# EAGLE board WAVESHIELD (EAGLE 6.1)
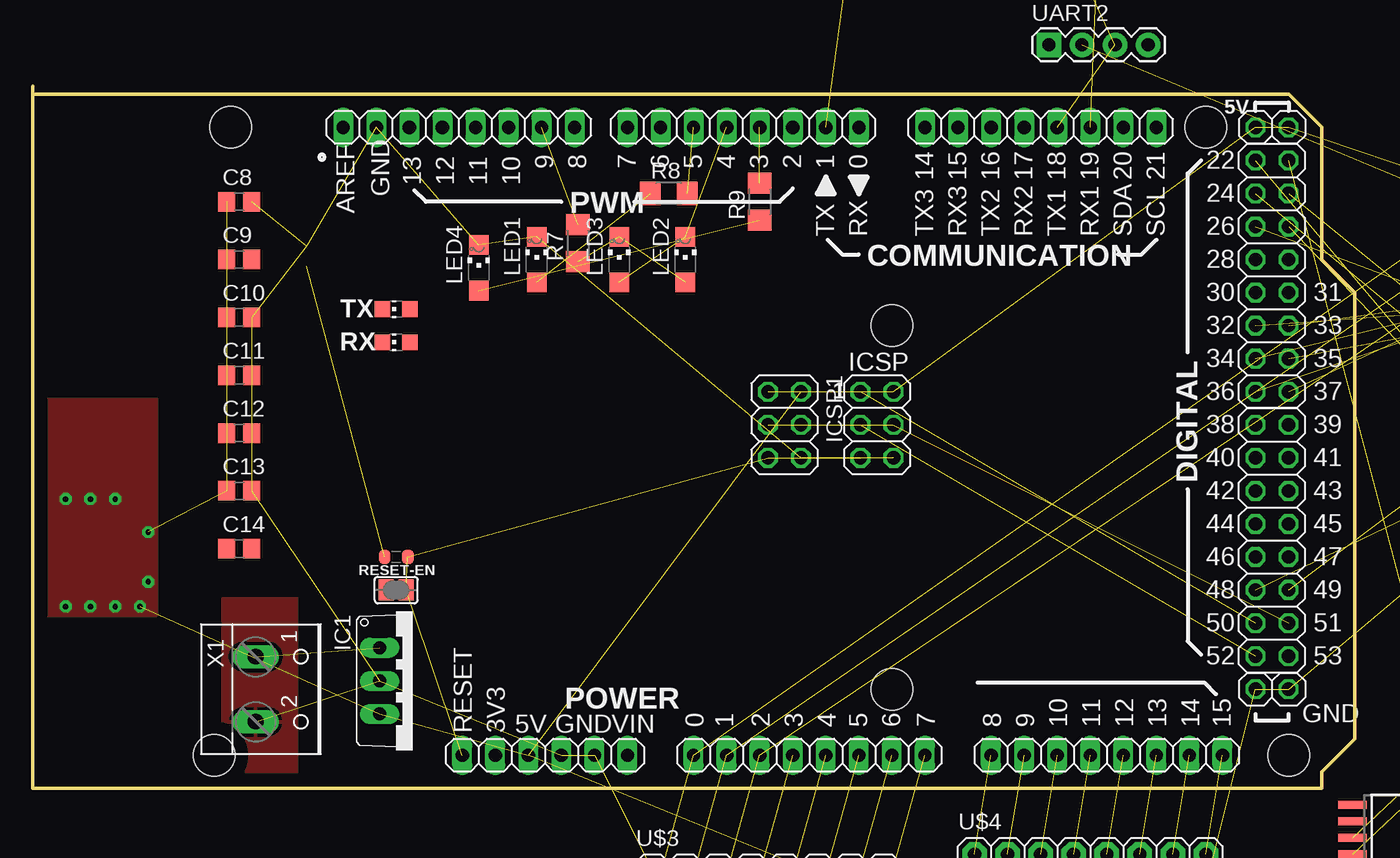
[diagram p0: board, top side]
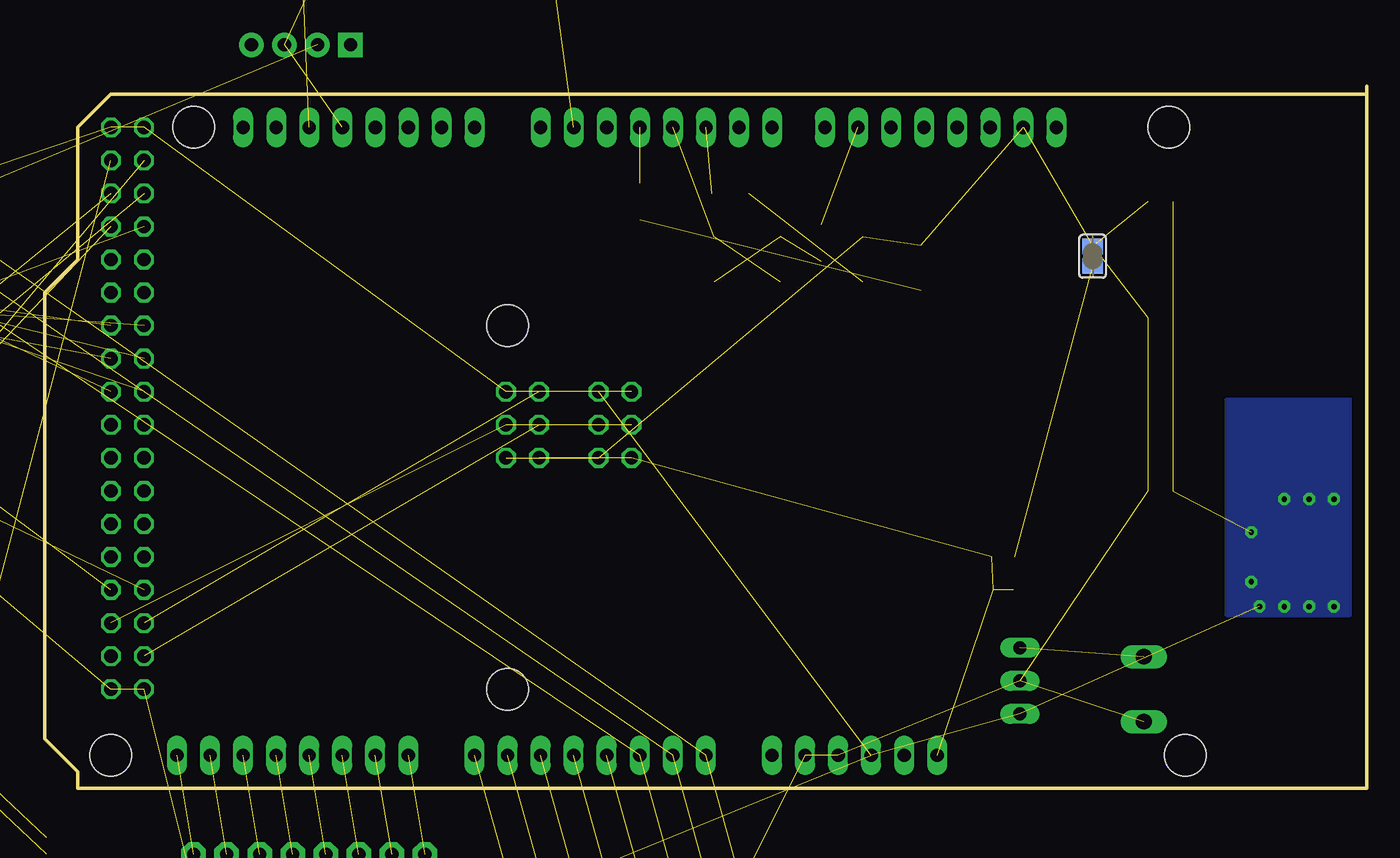
[diagram p1: board, bottom side, seen from below]

Size 101.6 x 53.98 mm. Coordinates in mm from the lower left corner, seen from the top.
Outline: 0,53.34 96.52,53.34 99.06,50.8 99.06,40.64 101.6,38.1 101.6,3.81 99.06,1.27 99.06,0 0,0 0,53.34
Outline: 0,53.34 0,53.98
Copper layers (1*16): Top 0.035mm / dielectric 1.5mm / Bottom 0.035mm
Design rules: minimum track width 6mil, minimum drill 12mil, track to track 6mil, track to pad 6mil, pad to pad 6mil, via to via 6mil, smd to smd 6mil, copper to edge 40mil, drill to drill 12mil, minimum pad ring 10mil, minimum via ring 10mil, stop-mask expansion 2mil, vias tented up to drill 1mil, thermal gap 10mil
Net classes: 0 default: width 0.152 mm, drill 0.305 mm, clearance 0.152 mm
Holes 3.2 mm at 96.52,2.54 15.24,50.8 90.17,50.8 13.97,2.54 66.04,35.56 66.04,7.62

## Footprints (pad centres in the part's own frame; a part is rotated, then mirrored left to right if it is on the bottom)
C0805 = smd 1.3 x 1.5: 1 -0.95,0; 2 0.95,0
C0603-ROUND = smd 0.898 x 1.1: 1 -0.889,0; 2 0.889,0
1X08 = drill 1.016 long: 1 -8.89,0; 2 -6.35,0; 3 -3.81,0; 4 -1.27,0; 5 1.27,0; 6 3.81,0; 7 6.35,0; 8 8.89,0
TO220V = drill 1.016 long: 1 -2.54,-2.54; 2 0,-2.54; 3 2.54,-2.54
SO-16W = smd 0.6 x 2.2: 1 -4.445,-4.6; 2 -3.175,-4.6; 3 -1.905,-4.6; 4 -0.635,-4.6; 5 0.635,-4.6; 6 1.905,-4.6; 7 3.175,-4.6; 8 4.445,-4.6; 9 4.445,4.6; 10 3.175,4.6; 11 1.905,4.6; 12 0.635,4.6; 13 -0.635,4.6; 14 -1.905,4.6; 15 -3.175,4.6; 16 -4.445,4.6
2X03 = drill 1.016 octagon: 1 -2.54,-1.27; 2 -2.54,1.27; 3 0,-1.27; 4 0,1.27; 5 2.54,-1.27; 6 2.54,1.27
1X01 = drill 1.016 octagon: 1 0,0
2X5-SHROUDED_LOCK = drill 1.016 pad 1.88 octagon: 1 -1.397,5.08; 2 1.397,5.08; 3 -1.397,2.54; 4 1.397,2.54; 5 -1.397,0; 6 1.397,0; 7 -1.397,-2.54; 8 1.397,-2.54; 9 -1.397,-5.08; 10 1.397,-5.08
CHIPLED_1206 = smd 1.5 x 1.5: A 0,-1.75; C 0,1.75
1X06 = drill 1.016 long: 1 -6.35,0; 2 -3.81,0; 3 -1.27,0; 4 1.27,0; 5 3.81,0; 6 6.35,0
M0805 = smd 1.3 x 1.6: 1 -0.95,0; 2 0.95,0
R1206 = smd 1.6 x 1.803: 1 -1.422,0; 2 1.422,0
SJ = smd 1.168 x 1.6: 1 -0.762,0; 2 0.762,0
CHIP-LED0805 = smd 1.2 x 1.2: A 0,-1.05; C 0,1.05
2X4 = drill 1.016 pad 1.88 octagon: 1 -3.81,-1.27; 2 -3.81,1.27; 3 -1.27,-1.27; 4 -1.27,1.27; 5 1.27,-1.27; 6 1.27,1.27; 7 3.81,-1.27; 8 3.81,1.27
2X8 = drill 1.016 pad 1.88 octagon: 1 0,0; 2 0,2.54; 3 2.54,0; 4 2.54,2.54; 5 5.08,0; 6 5.08,2.54; 7 7.62,0; 8 7.62,2.54; 9 10.16,0; 10 10.16,2.54; 11 12.7,0; 12 12.7,2.54; 13 15.24,0; 14 15.24,2.54; 15 17.78,0; 16 17.78,2.54
1X04 = drill 1.016 pad 1.88 square: 1 0,0 | drill 1.016 pad 1.88: 2 2.54,0; 3 5.08,0; 4 7.62,0
W237-102 = drill 1.194 long: 1 -2.5,-1.27; 2 2.5,-1.27
2X08 = drill 1.016 octagon: 1 -8.89,-1.27; 2 -8.89,1.27; 3 -6.35,-1.27; 4 -6.35,1.27; 5 -3.81,-1.27; 6 -3.81,1.27; 7 -1.27,-1.27; 8 -1.27,1.27; 9 1.27,-1.27; 10 1.27,1.27; 11 3.81,-1.27; 12 3.81,1.27; 13 6.35,-1.27; 14 6.35,1.27; 15 8.89,-1.27; 16 8.89,1.27

## Placement (x,y rotation side)
C1  [C0805]  111.12,-12.7 0 top  (outside the outline)
C2  [C0805]  106.68,-13.33 0 top  (outside the outline)
C3  [C0805]  124.46,-8.25 0 top  (outside the outline)
C4  [C0805]  129.54,-7.62 0 top  (outside the outline)
C5  [C0805]  136.53,-10.16 0 top  (outside the outline)
C6  [C0805]  140.34,-8.25 0 top  (outside the outline)
C7  100n  [C0603-ROUND]  27.94,17.78 0 top
C8  [C0805]  15.88,45.09 0 top
C9  [C0805]  15.88,40.64 0 top
C10  [C0805]  15.88,36.2 0 top
C11  [C0805]  15.88,31.75 0 top
C12  [C0805]  15.88,27.31 0 top
C13  [C0805]  15.88,22.86 0 top
C14  [C0805]  15.88,18.42 0 top
COMMUNICATION  [1X08]  77.47,50.8 180 top
IC1  7805TV  [TO220V]  29.21,8.25 270 top
IC2  AD7376  [SO-16W]  106.05,-5.71 90 top
IC3  AD7376  [SO-16W]  127,13.97 90 top  (outside the outline)
IC4  AD7376  [SO-16W]  137.16,24.77 90 top  (outside the outline)
ICSP  ICSP  [2X03]  64.9,27.94 270 top
ICSP1  ICSP  [2X03]  57.78,27.94 270 top
JP1  [1X01]  93.98,50.8 0 top
JP2  [1X01]  96.52,50.8 0 top
JP3  [1X01]  93.98,7.62 0 top
JP4  [1X01]  96.52,7.62 0 top
JP6  [2X03]  12.7,-10.79 0 top  (outside the outline)
JP7  [1X08]  81.28,-11.43 0 top  (outside the outline)
KNUCK1  M05X2SHD_LOCK  [2X5-SHROUDED_LOCK]  125.09,40.64 0 top  (outside the outline)
KNUCK2  M05X2SHD_LOCK  [2X5-SHROUDED_LOCK]  139.06,41.28 0 top  (outside the outline)
KNUCK3  M05X2SHD_LOCK  [2X5-SHROUDED_LOCK]  111.12,41.28 0 top  (outside the outline)
LED1  [CHIPLED_1206]  38.73,40.64 0 top
LED2  [CHIPLED_1206]  50.16,40.64 0 top
LED3  [CHIPLED_1206]  45.09,40.64 0 top
LED4  [CHIPLED_1206]  34.29,40.01 0 top
PE1  [2X03]  61.59,67.31 90 top  (outside the outline)
PE2  [2X03]  80.64,67.95 270 top  (outside the outline)
PE7  [2X03]  111.12,23.5 90 top  (outside the outline)
PORTF  [1X08]  59.69,2.54 0 top
PORTL  [1X08]  82.55,2.54 0 top
POWER  [1X06]  39.37,2.54 0 top
PWMH  [1X08]  32.77,50.8 180 top
PWML  [1X08]  54.61,50.8 180 top
R1  [M0805]  110.49,-15.87 0 top  (outside the outline)
R2  [M0805]  106.05,-15.87 0 top  (outside the outline)
R3  [M0805]  123.82,-12.7 0 top  (outside the outline)
R4  [M0805]  128.27,-10.79 0 top  (outside the outline)
R5  [M0805]  140.97,-13.97 0 top  (outside the outline)
R6  [M0805]  137.16,-13.97 0 top  (outside the outline)
R7  [R1206]  41.91,41.91 90 top
R8  [R1206]  48.89,45.72 0 top
R9  [R1206]  55.88,45.09 90 top
RESET-EN  [SJ]  27.94,15.24 0 top
RX  YELLOW  [CHIP-LED0805]  27.94,34.29 90 top
TX  YELLOW  [CHIP-LED0805]  27.94,36.83 90 top
U$1  M04X2  [2X4]  106.05,-20.32 0 top  (outside the outline)
U$2  M04X2  [2X4]  125.09,-18.41 0 top  (outside the outline)
U$3  M08X2  [2X8]  47.62,-8.89 0 top  (outside the outline)
U$4  M08X2  [2X8]  72.39,-7.62 0 top  (outside the outline)
U$5  M04X2  [2X4]  137.79,-18.41 0 top  (outside the outline)
UART2  [1X04]  78.11,57.15 0 top  (outside the outline)
UBOOT  [SJ]  21.08,40.89 90 bottom
X1  [W237-102]  18.41,7.62 270 top
XIOH  [2X08]  95.25,39.37 90 top
XIOL  [2X08]  95.25,19.05 90 top

## Library data of the parts
C1-C6 C8-C14 = rcl
C7 = SmartPrj
COMMUNICATION ICSP ICSP1 JP1-JP4 JP6 JP7 PE1 PE2 PE7 PORTF PORTL POWER PWMH PWML XIOH XIOL = pinhead
IC1 = linear
IC2-IC4 = analog-devices
KNUCK1-KNUCK3 U$1-U$5 UART2 = SparkFun-Connectors
LED1-LED4 RX TX = led
R1-R9 = resistor
RESET-EN UBOOT = jumper
X1 = con-wago-500; MPN: 237-102; OC_FARNELL: unknown; OC_NEWARK: 70K9898

## Nets
+5V: C8.1 C9.1 C10.1 C12.1 C13.1 IC1.3 ICSP1.2 ICSP.2 JP1.1 JP2.1 JP7.1 JP7.2 JP7.3 JP7.4 JP7.5 JP7.6 JP7.7 JP7.8 KNUCK1.1 KNUCK1.2 KNUCK2.1 KNUCK2.2 KNUCK3.1 KNUCK3.2 POWER.3
ADC8: PORTL.1 U$4.2
ADC9: PORTL.2 U$4.4
ADC10: PORTL.3 U$4.6
ADC11: PORTL.4 U$4.8
ADC12: PORTL.5 U$4.10
ADC13: PORTL.6 U$4.12
ADC14: PORTL.7 U$4.14
ADC15: PORTL.8 U$4.16
AREF: PWMH.8
DTR: C7.1 UBOOT.1
GND: C1.2 C2.2 C3.2 C4.2 C5.2 C6.2 C8.2 C10.2 C12.2 C13.2 IC1.2 IC2.4 IC3.4 IC4.4 ICSP1.6 ICSP.6 JP3.1 JP4.1 KNUCK1.4 KNUCK1.6 KNUCK1.8 KNUCK1.10 KNUCK2.4 KNUCK2.6 KNUCK2.8 KNUCK2.10 KNUCK3.4 KNUCK3.6 KNUCK3.8 KNUCK3.10 LED1.C LED4.C PE7.1 PE7.3 PE7.5 POWER.4 POWER.5 PWMH.7 U$3.2 U$3.4 U$3.6 U$3.8 U$3.10 U$3.12 U$3.14 U$3.16 U$4.15 UART2.2 UBOOT.2 X1.2
N$1: LED2.A LED3.C R7.1
N$4: UART2.1
N$5: LED1.A R8.1
N$6: LED4.A R9.1
N$8: PE1.2 PE1.4 PE1.6
N$10: C1.1 IC2.1 IC2.3 R1.1 U$1.7 U$1.8
N$12: IC1.1 X1.1
N$13: R1.2 R2.1 U$1.3 U$1.4
N$14: IC2.16 U$1.1 U$1.2
N$15: C3.1 IC3.1 IC3.3 R3.1 U$2.7 U$2.8
N$16: C4.1 IC3.2 R4.2 U$2.5 U$2.6
N$17: R3.2 R4.1 U$2.3 U$2.4
N$18: IC3.16 U$2.1 U$2.2
N$19: C5.1 IC4.1 IC4.3 R5.1 U$5.7 U$5.8
N$20: C6.1 IC4.2 R6.2 U$5.5 U$5.6
N$21: R5.2 R6.1 U$5.3 U$5.4
N$22: IC4.16 U$5.1 U$5.2
N$55: TX.A
PA0: IC2.12 IC3.12 IC4.12 XIOH.16
PA1: IC2.5 XIOH.15
PA2: IC3.5 XIOH.14
PA3: IC2.7 IC3.7 IC4.7 XIOH.13
PA4: IC4.5 XIOH.12
PA5: IC2.11 IC3.11 IC4.11 XIOH.11
PA6: XIOH.10
PA7: XIOH.9
PB0: XIOL.1
PB1: ICSP1.3 ICSP.3 XIOL.2
PB2: ICSP1.4 ICSP.4 XIOL.3
PB3: ICSP1.1 ICSP.1 XIOL.4
PB4: PWMH.3
PB5: PWMH.4
PB6: PWMH.5
PB7: PWMH.6
PC0: KNUCK1.3 XIOH.1
PC1: KNUCK1.5 XIOH.2
PC2: KNUCK1.7 XIOH.3
PC3: KNUCK2.3 XIOH.4
PC4: KNUCK2.5 XIOH.5
PC5: KNUCK2.7 XIOH.6
PC6: XIOH.7
PC7: XIOH.8
PD7: XIOL.16
PE0: PWML.1
PE1: PE1.1 PE1.3 PE1.5 PWML.2
PE3: PWML.6 R8.2
PE4: PWML.3
PE5: PWML.4 R9.2
PE7/ICP3: KNUCK3.9 PE7.2 PE7.4 PE7.6
PF0: KNUCK3.3 PORTF.1 U$3.1
PF1: KNUCK3.5 PORTF.2 U$3.3
PF2: KNUCK3.7 PORTF.3 U$3.5
PF3: PORTF.4 U$3.7
PF4: PORTF.5 U$3.9
PF5: PORTF.6 U$3.11
PF6: PORTF.7 U$3.13
PF7: PORTF.8 U$3.15
PG0: XIOL.13
PG1: XIOL.14
PG2: XIOL.15
PG5: LED2.C LED3.A PWML.5
PH3: PWML.7
PH4: PWML.8
PH5: PWMH.1
PH6: PWMH.2 R7.2
PL0: KNUCK1.9 XIOL.5
PL1: KNUCK2.9 XIOL.6
PL2: XIOL.7
PL3: XIOL.8
PL4: XIOL.9
PL5: XIOL.10
PL6: XIOL.11
PL7: XIOL.12
RESET: C7.2 ICSP1.5 ICSP.5 POWER.1 RESET-EN.1 RESET-EN.2
RXD1: COMMUNICATION.3 PE2.2 PE2.4 PE2.6
RXD2: COMMUNICATION.5
RXD3: COMMUNICATION.7
RXL: RX.C
SCL: COMMUNICATION.1
SDA: COMMUNICATION.2
TXD1: COMMUNICATION.4 PE2.1 PE2.3 PE2.5 UART2.3
TXD2: COMMUNICATION.6
TXD3: COMMUNICATION.8
TXL: TX.C
TXR1: UART2.4
VALVE1: C2.1 IC2.2 IC2.14 R2.2 U$1.5 U$1.6
VDD: IC3.14 IC4.14
VIN: POWER.6

## Tracks (layer width: path | path; a pad name or v marks a point on that pad's centre or on a via)
+5V  (via drill 0.41)  (25 unrouted)
  other vias: 6.35,22.22 4.45,22.22 2.54,22.22 8.89,19.68 2.54,13.97 6.35,13.97 4.45,13.97 8.89,15.88 8.25,13.97
  pour Top (isolate 0.305, no thermals): 9.52,13.34 9.52,29.85 0.63,29.85 0.63,13.34
  pour Bottom: 1.27,13.34 1.27,29.85 10.79,29.85 10.79,13.34
ADC8  (1 unrouted)
ADC9  (1 unrouted)
ADC10  (1 unrouted)
ADC11  (1 unrouted)
ADC12  (1 unrouted)
ADC13  (1 unrouted)
ADC14  (1 unrouted)
ADC15  (1 unrouted)
DTR  (1 unrouted)
GND  (49 unrouted)
  Bottom 0.813: 93.73,7.87 JP3.1
  pour Top (isolate 0.305, rank 2): 14.6,14.61 20.32,14.61 20.32,1.27 14.6,1.27
  pour Bottom (isolate 0.356, rank 2): 97.16,1.27 101.6,52.7 102.23,52.07 102.23,0.64
N$1  (2 unrouted)
N$5  (1 unrouted)
N$6  (1 unrouted)
N$8  (2 unrouted)
N$10  (5 unrouted)
N$12  (1 unrouted)
N$13  (3 unrouted)
N$14  (2 unrouted)
N$15  (5 unrouted)
N$16  (4 unrouted)
N$17  (3 unrouted)
N$18  (2 unrouted)
N$19  (5 unrouted)
N$20  (4 unrouted)
N$21  (3 unrouted)
N$22  (2 unrouted)
PA0  (3 unrouted)
PA1  (1 unrouted)
PA2  (1 unrouted)
PA3  (3 unrouted)
PA4  (1 unrouted)
PA5  (3 unrouted)
PB1  (2 unrouted)
PB2  (2 unrouted)
PB3  (2 unrouted)
PC0  (1 unrouted)
PC1  (1 unrouted)
PC2  (1 unrouted)
PC3  (1 unrouted)
PC4  (1 unrouted)
PC5  (1 unrouted)
PE1  (3 unrouted)
PE3  (1 unrouted)
PE5  (1 unrouted)
PE7/ICP3  (3 unrouted)
PF0  (2 unrouted)
PF1  (2 unrouted)
PF2  (2 unrouted)
PF3  (1 unrouted)
PF4  (1 unrouted)
PF5  (1 unrouted)
PF6  (1 unrouted)
PF7  (1 unrouted)
PG5  (2 unrouted)
PH6  (1 unrouted)
PL0  (1 unrouted)
PL1  (1 unrouted)
RESET  (5 unrouted)
RXD1  (3 unrouted)
TXD1  (4 unrouted)
VALVE1  (5 unrouted)
VDD  (1 unrouted)

## Text on the board
tPlace: 9 | 8 | 7 | 6 | 5 | 4 | 3 | 2 | 1 | 0 | 22 | 14 | 15 | 16 | 17 | 18 | 19 | 20 | 21 | 13 | 12 | 11 | 10 | 24 | 26 | 28 | 30 | 31 | 32 | 33 | 34 | 35 | 36 | 37 | 38 | 39 | 40 | 41 | 42 | 43 | 44 | 45 | 46 | 47 | 48 | 49 | 50 | 51 | 52 | 53 | 0 | 1 | 2 | 3 | 4 | 5 | 6 | 7 | 8 | 9 | 10 | 11 | 12 | 13 | 14 | 15
tNames: 5V | GND | AREF | PWM | TX | RX | TX3 | RX3 | TX2 | RX2 | TX1 | RX1 | SDA | SCL | 1 | DIGITAL | GND | RESET | 3V3 | 5V | GND | VIN
ReferenceLC: L | TX | RX | PC1 | PC2